# Altium PCB Lora_ver1.0.PcbDoc
Units mil, origin at the board's own origin, x right, y up, seen from the top; angles counter-clockwise.
Board outline 1653.54 x 3149.61 mil, 2 copper layers (Top Layer, Bottom Layer); 29 components, 19 nets, 108 pads, 13 vias.
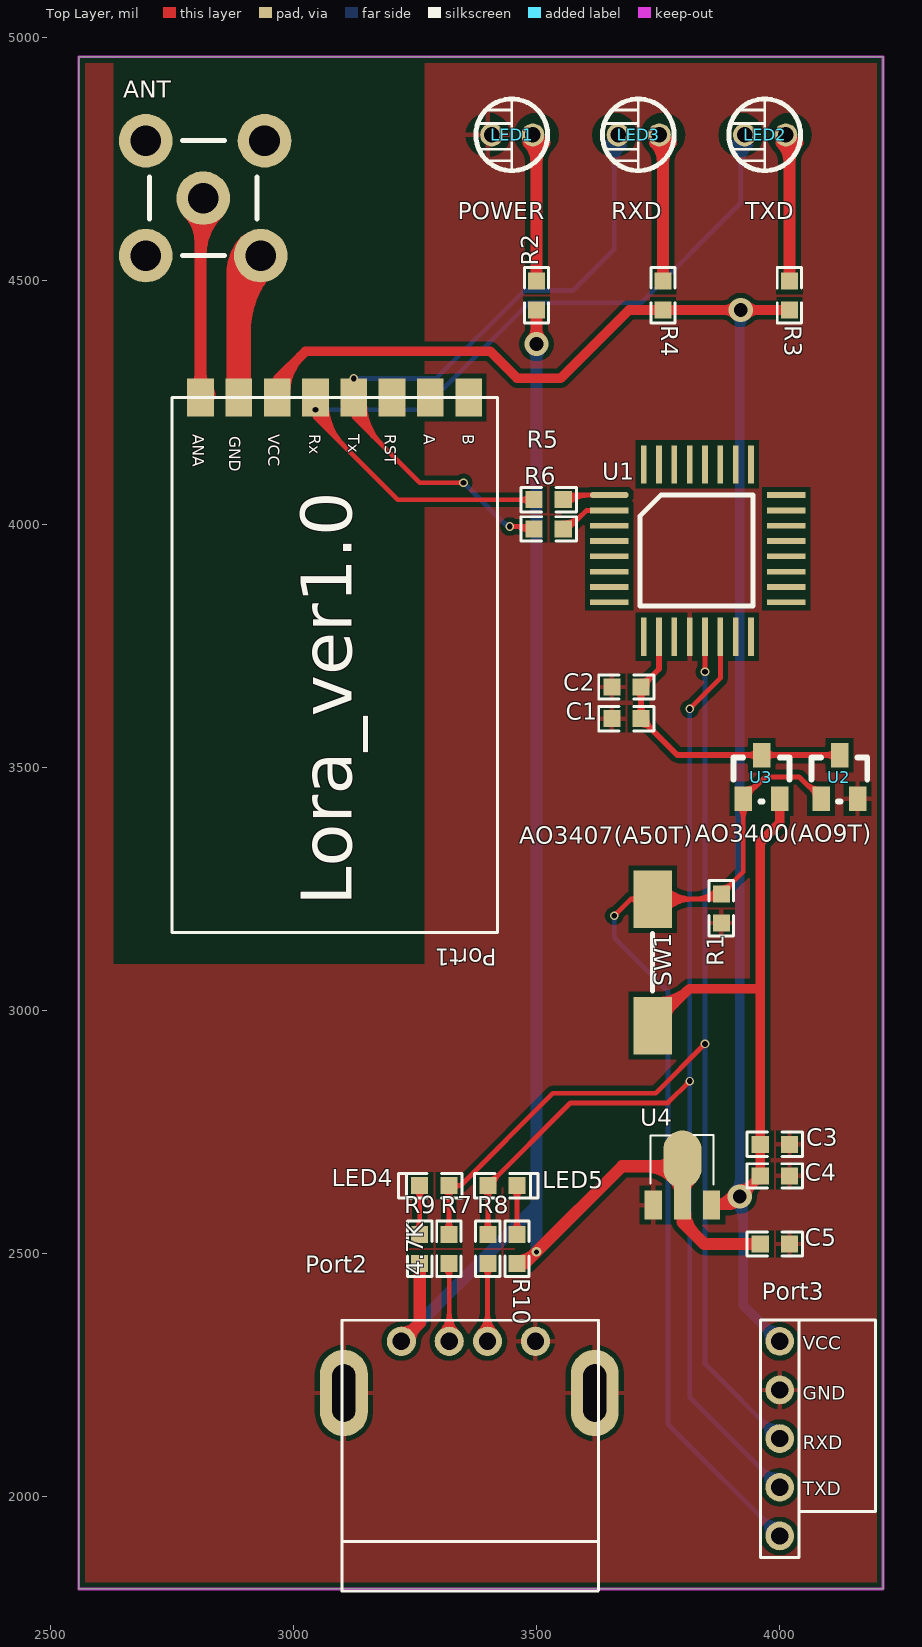
[diagram p0: Top Layer view]
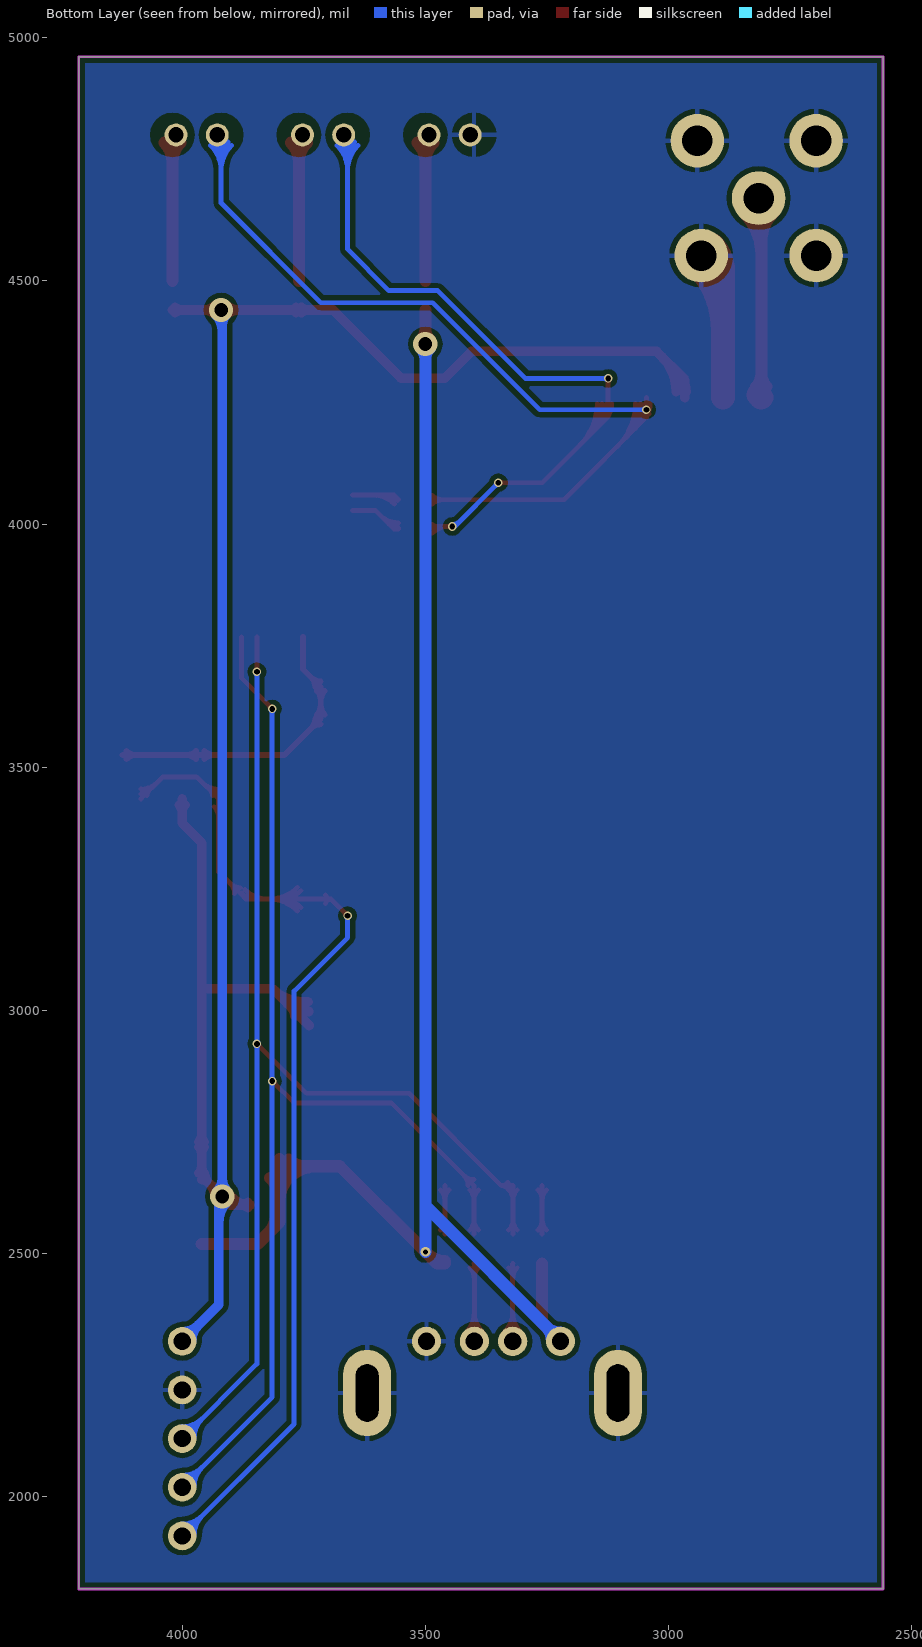
[diagram p1: Bottom Layer view, seen from below]

## Layer stack, top to bottom
Top Layer: signal copper 1.4
Dielectric: dielectric 12.6, FR-4, Dk 4.8
Bottom Layer: signal copper 1.4

## Board outline
2559.06,1811.02 4212.6,1811.02 4212.6,4960.63 2559.06,4960.63

## Design rules (kind name [scope] priority, off if disabled: settings)
Clearance [All] p1: gap=10
PolygonConnect [All] p1: connectstyle=Relief reliefconductorwidth=10 reliefentries=4 polygonreliefangle="90 Angle"
RoutingVias [All] p1: holewidth=28 width=50 viastyle="Through Hole" minholewidth=8 minwidth=10 maxholewidth=28 maxwidth=50
SilkscreenOverComponentPads [All] p1: minsilkscreentomaskgap=10
SolderMaskExpansion [All] p1: expansion=4
Width [All] p1: maxlimit=50 minlimit=10 preferedwidth=10
27 further rules are at their usual default settings.

## Components (designator, comment, footprint, x,y, rotation, side; value= is the part's Value field where it differs from the comment)
ANT "ANT" SWA-KE天线母座 2815,4670 r0 top
C1 "47uF" 0603 3655,3600 r0 top
C2 "104" 0603 3655,3665 r0 top
C3 "104" 0603 4020,2725 r180 top
C4 "104" 0603 3960,2660 r0 top
C5 "10uF" 0603 3960,2520 r0 top
LED1 "POWER" 2.54LED 3400,4800 r180 top
LED2 "TXD" 2.54LED 3920,4800 r180 top
LED3 "RXD" 2.54LED 3660,4800 r180 top
LED4 "RX" LED-0603 3260,2640 r0 top
LED5 "TX" LED-0603 3460,2640 r180 top
Port1 "Lora" LoRa_Usart 3085,4260 r270 top
Port2 "USB_A" USB-A 3360,2320 r0 top
Port3 "DEBUG" STC_DEBUG 4000,2120 r0 top
R1 "1M" 0603 3880,3180 r90 top
R2 "4.7K" 0603 3500,4500 r270 top
R3 "4.7K" 0603 4020,4500 r270 top
R4 "4.7K" 0603 3760,4500 r270 top
R5 "0R" 0603 3495,4050 r0 top
R6 "0R" 0603 3495,3990 r0 top
R7 "0R" 0603 3320,2480 r90 top
R8 "0R" 0603 3400,2480 r90 top
R9 "4.7K" 0603 3260,2540 r270 top
R10 "4.7K" 0603 3460,2540 r270 top
SW1 "REST" SW-1 3660,3040 r180 top
U1 "STC8F2K32S2" LQPF-32 3685,4095 r0 top
U2 "AO3400(AO9T)" SOT-23 4120,3480 r0 top
U3 "AO3407(A50T)" SOT-23 3960,3480 r0 top
U4 "HT7533-1" 3A5A3D 3800,2600 r0 top

## Footprints (in the part's own frame and the unit in brackets; to place one, negate y for a bottom-side part, rotate by r counter-clockwise, add the part's x,y. Pads: shape width x height; smd on the part's side, far side on the other; paste and mask are expansions set on the pad)
2.54LED [mm]
  round 1.2 hole 0.8: 1(-2.35,0) 2(-0.2,0)
  silkscreen extent -3.12,-1.87 0.62,1.9
3A5A3D [mm]
  rect 0.9x1.5 smd: 1(-1.524,0) 3(1.524,0)
  rect 0.9x1.8 smd: 2(0,0.15)
  oval 2x3 smd: 2(0,2.4)
  silkscreen extent -1.68,1.07 1.63,3.67
0603 [mil]
  rect 35x35 smd: 1(0,0) 2(60,0)
  silkscreen extent -27,-25 87,25
LED-0603 [mil]
  rect 35x35 smd: 1(0,0) 2(60,0)
  silkscreen extent -43,-25 87,25
LoRa_Usart [mm]
  rect 2x1.397 smd: 1(0,7) 2(0,5) 3(0,3) 4(0,1) 5(0,-1) 6(0,-3) 7(0,-5) 8(0,-7)
  silkscreen extent 0,-8.5 27.94,8.5
LQPF-32 [mm]
  oct 2x0.3 smd: 1(-0.9,-0.9)
  rect 2x0.3 smd: 2(-0.9,-1.7) 3(-0.9,-2.5) 4(-0.9,-3.3) 5(-0.9,-4.1) 6(-0.9,-4.9) 7(-0.9,-5.7) 8(-0.9,-6.5) 17(8.35,-6.5) 18(8.35,-5.7) 19(8.35,-4.9) 20(8.35,-4.1) 21(8.35,-3.3) 22(8.35,-2.5) 23(8.35,-1.7) 24(8.35,-0.9)
  rect 0.3x2 smd: 9(0.9,-8.3) 10(1.7,-8.3) 11(2.5,-8.3) 12(3.3,-8.3) 13(4.1,-8.3) 14(4.9,-8.3) 15(5.7,-8.3) 16(6.5,-8.3) 25(6.5,0.7) 26(5.7,0.7) 27(4.9,0.7) 28(4.1,0.7) 29(3.3,0.7) 30(2.5,0.7) 31(1.7,0.7) 32(0.9,0.7)
  silkscreen extent 0.7,-6.7 6.6,-0.9
SOT-23 [mil]
  rect 36x50 smd: 1(40,-45) 2(-35,-45) 3(3,45)
  silkscreen extent -55,-50 60,40
STC_DEBUG [mm]
  round 1.5 hole 0.9: 1(0,5.08) 2(0,2.54) 3(0,0) 4(0,-2.54) 5(0,-5.08)
  silkscreen extent -1,-6.2 5,6.2
SW-1 [mm]
  rect 2x3 smd: 1(-2,1.8) 2(-2,-4.8)
  silkscreen extent -2,-3 -2,0
SWA-KE天线母座 [mm]
  round 2.8 hole 1.6: 1(0,0) 2(-3,-3) 2(-3,3) 2(3,-3) 2(3.2,3)
  silkscreen extent -2.8,-3 2.8,3
USB-A [mm]
  round 1.524 hole 0.9: 1(-3.5,0) 2(-1,0) 3(1,0) 4(3.5,0)
  oval 2.5x4.5 hole 1.2 slot 3 at 90 deg: 4(-6.5,-2.7) 4(6.6,-2.7)
  silkscreen extent -6.6,-13.05 6.8,1.1

## Part data
ANT C1 C2 C3 C4 C5: library part Cap, "Capacitor"
LED1 LED2 LED3 LED4 LED5: library part DIODE, "diode"
Port2: library part USB
Port3: library part PIN-5
R1 R2 R3 R4 R5 R6 R7 R8 R9 R10: library part Res2, "Resistor"
SW1: library part SW-P, "key"
U1: library part STC8F2K64S2
U2: library part MOSFET-N, "mosfet"
U3: library part MOSFET-P, "mosfet"

## Via types
v1: diameter 17.72, hole 11.81, Top Layer to Bottom Layer, 9 vias
v2: diameter 50, hole 28, Top Layer to Bottom Layer, 3 vias
v3: diameter 20, hole 10, Top Layer to Bottom Layer, 1 vias

## Nets (pads, with @x,y where several pads share a name; then routed paths per layer and width w, separated by ;. In a path a pad name is that pad's centre, name@x,y a point inside that pad or via, vN(x,y) a via of type N, cw(c..) or ccw(c..) an arc to the next point about the centre after c; other vN are vias at no path point)
ANT: ANT.1 Port1.8 | length 687.1
  Top Layer w20: ANT.1@2809.41,4664.41 ANT.1
  Top Layer w25: ANT.1@2784.86,4639.86 cw(c2725.61,4580.61) 2809.41,4580.61 ; Port1.8@2798.8,4282.48 ccw(c2773.2,4308.08) 2809.41,4308.08 ccw(c2845.62,4308.08) Port1.8@2820.02,4282.48 ; Port1.8 ANT.1@2809.41,4664.41 ; 2809.41,4553.61 cw(c2931.39,4553.61) ANT.1@2845.14,4639.86 ; 2809.41,4613.97 cw(c2871.03,4613.97) ANT.1@2827.46,4657.54
  Top Layer w50: Port1.8 Port1.8@2815,4265.59
GND: ANT.2 C1.1 C2.1 C3.1 C4.2 C5.2 LED1.2 Port1.7 Port2.4 Port3.2 R1.1 U1.12 U2.1 U4.1 | length 533.4
  Top Layer w50: Port1.7 2888.15,4522.68 ANT.2@2925.24,4559.76 ; 2888.15,4397.52 cw(c3087.48,4397.52) ANT.2@2946.53,4538.47 ; 2888.15,4518.23 cw(c2966.77,4518.23) ANT.2@2911.18,4573.82
LORA-RX: LED3.2 Port1.4 R6.1 | length 2039.4
  Top Layer w10: Port1.4@3116.87,4248.13 ccw(c3165.15,4248.13) 3131.01,4213.99 ; Port1.4@3121.64,4296.64 cw(c3115.06,4290.06) 3124.37,4290.06 cw(c3133.68,4290.06) Port1.4@3127.1,4296.64 ; v1(3124.37,4299.37) Port1.4 3124.37,4220.63 3260,4085 v1(3350,4085) ; Port1.4@3126.87,4248.13 ccw(c3199.3,4248.13) 3148.08,4196.92 ; Port1.4@3136.87,4248.13 ccw(c3233.44,4248.13) 3165.15,4179.85 ; Port1.4@3146.87,4248.13 ccw(c3267.58,4248.13) 3182.23,4162.77 ; v1@3347.27,4082.27 ccw(c3340.69,4075.69) 3340.69,4085 ccw(c3340.69,4094.31) v1@3347.27,4087.73 ; v1(3445,3995) 3490,3995 R6.1 ; v1@3447.73,3992.27 cw(c3454.31,3985.69) 3454.31,3995 cw(c3454.31,4004.31) v1@3447.73,3997.73 ; v1@3452.75,3995 cw(c3452.75,3947.75) R6.1@3486.16,3981.16 ; R6.1@3486.16,3998.84 cw(c3476.89,4008.11) 3476.89,3995 cw(c3476.89,3971.89) R6.1@3493.23,3988.23
  Bottom Layer w10: v1(3124.37,4299.37) 3294.37,4299.37 3475,4480 3575,4480 3660,4565 LED3.2@3660,4800 ; v1@3127.1,4296.64 cw(c3133.68,4290.06) 3133.68,4299.37 cw(c3133.68,4308.68) v1@3127.1,4302.1 ; v1@3350,4081.14 cw(c3350,4071.83) 3356.59,4078.41 cw(c3363.17,4085) v1@3353.86,4085 ; v1(3350,4085) 3440,3995 v1(3445,3995) ; 3429.88,4005.12 ccw(c3445,4020.24) v1@3445,3998.86 ; 3638.48,4778.48 cw(c3586.53,4726.53) 3660,4726.53 cw(c3733.47,4726.53) 3681.52,4778.48 ; 3645.55,4785.55 cw(c3610.67,4750.67) 3660,4750.67 cw(c3709.33,4750.67) LED3.2@3674.45,4785.55
LORA-TX: LED2.2 Port1.5 R5.1 | length 2298.4
  Top Layer w10: Port1.5@3038.13,4248.13 ccw(c3089.46,4248.13) 3053.16,4211.84 ; Port1.5@3040.22,4226.29 cw(c3038.5,4219.37) 3045.63,4219.37 ; Port1.5@3042.9,4237.73 ccw(c3036.32,4244.31) 3045.63,4244.31 ccw(c3054.94,4244.31) Port1.5@3048.36,4237.73 ; v1(3045.63,4235) Port1.5 ; Port1.5@3048.13,4248.13 ccw(c3123.6,4248.13) 3070.23,4194.77 ; Port1.5@3051.04,4226.29 ccw(c3052.76,4219.37) 3045.63,4219.37 ; Port1.5@3058.13,4248.13 ccw(c3157.74,4248.13) 3087.3,4177.69 ; Port1.5@3068.13,4248.13 ccw(c3191.88,4248.13) 3104.38,4160.62 ; R5.1@3486.16,4041.16 ccw(c3464.82,4019.82) 3464.82,4050 ccw(c3464.82,4080.18) R5.1@3486.16,4058.84 ; R5.1 3215,4050 3045.63,4219.37
  Bottom Layer w10: v1(3045.63,4235) 3265,4235 3485,4455 3715,4455 3920,4660 LED2.2@3920,4800 ; v1@3048.36,4232.27 cw(c3054.94,4225.69) 3054.94,4235 cw(c3054.94,4244.31) v1@3048.36,4237.73 ; 3898.48,4778.48 cw(c3846.53,4726.53) 3920,4726.53 cw(c3993.47,4726.53) 3941.52,4778.48 ; 3905.55,4785.55 cw(c3870.67,4750.67) 3920,4750.67 cw(c3969.33,4750.67) LED2.2@3934.45,4785.55
NetLED1_1: LED1.1 R2.1 | length 387
  Top Layer w25: LED1.1@3483.78,4783.78 cw(c3444.63,4744.63) 3500,4744.63 cw(c3555.37,4744.63) 3516.22,4783.78 ; R2.1 LED1.1@3500,4800
NetLED2_1: LED2.1 R3.1 | length 387
  Top Layer w25: LED2.1@4003.78,4783.78 cw(c3964.63,4744.63) 4020,4744.63 cw(c4075.37,4744.63) 4036.22,4783.78 ; R3.1 LED2.1@4020,4800
NetLED3_1: LED3.1 R4.1 | length 387
  Top Layer w25: LED3.1@3743.78,4783.78 cw(c3704.63,4744.63) 3760,4744.63 cw(c3815.37,4744.63) 3776.22,4783.78 ; R4.1 LED3.1@3760,4800
NetLED4_1: LED4.1 R9.1 | length 194.8
  Top Layer w10: R9.1@3251.16,2548.84 ccw(c3229.82,2570.18) 3260,2570.18 ccw(c3290.18,2570.18) R9.1@3268.84,2548.84 ; LED4.1@3251.16,2631.16 cw(c3229.82,2609.82) 3260,2609.82 cw(c3290.18,2609.82) LED4.1@3268.84,2631.16 ; R9.1 LED4.1
NetLED5_1: LED5.1 R10.1 | length 194.8
  Top Layer w10: R10.1@3451.16,2548.84 ccw(c3429.82,2570.18) 3460,2570.18 ccw(c3490.18,2570.18) R10.1@3468.84,2548.84 ; LED5.1@3451.16,2631.16 cw(c3429.82,2609.82) 3460,2609.82 cw(c3490.18,2609.82) LED5.1@3468.84,2631.16 ; R10.1 LED5.1
NetPort2_2: Port2.2 R7.1 | length 359.4
  Top Layer w10: Port2.2@3302.95,2337.68 ccw(c3260.27,2380.36) 3320.63,2380.36 ccw(c3380.99,2380.36) Port2.2@3338.31,2337.68 ; Port2.2@3310.02,2330.61 ccw(c3284.42,2356.21) 3320.63,2356.21 ccw(c3356.84,2356.21) Port2.2@3331.24,2330.61 ; R7.1@3311.16,2471.16 cw(c3288.3,2448.3) 3320.63,2448.3 ; R7.1 3320.63,2479.37 Port2.2 ; 3320.63,2451.34 cw(c3348.66,2451.34) R7.1@3328.84,2471.16
NetPort2_3: Port2.3 R8.1 | length 359.4
  Top Layer w10: Port2.3@3381.69,2337.68 ccw(c3339.01,2380.36) 3399.37,2380.36 ccw(c3459.73,2380.36) Port2.3@3417.05,2337.68 ; Port2.3@3388.76,2330.61 ccw(c3363.16,2356.21) 3399.37,2356.21 ccw(c3435.58,2356.21) Port2.3@3409.98,2330.61 ; R8.1@3391.16,2471.16 cw(c3371.34,2451.34) 3399.37,2451.34 ; Port2.3 3399.37,2479.37 R8.1 ; 3399.37,2448.3 cw(c3431.7,2448.3) R8.1@3408.84,2471.16
P10: R5.2 U1.1 | length 178.3
  Top Layer w10: R5.2 3564.57,4059.57 U1.1 ; R5.2@3556.77,4048.23 cw(c3584.13,4020.87) 3584.13,4059.57 ; R5.2@3563.84,4041.16 cw(c3608.27,3996.73) 3608.27,4059.57
P11: R6.2 U1.2 | length 176.7
  Top Layer w10: R6.2 3565,3990 3603.07,4028.07 U1.2 ; R6.2@3555,3992.5 ccw(c3555,4022.68) 3576.34,4001.34 ; R6.2@3555,4002.5 ccw(c3555,4056.82) 3593.41,4018.41
RXD: LED4.2 Port3.3 R7.2 U1.13 | length 2806.7
  Top Layer w10: R7.2@3311.16,2548.84 ccw(c3289.82,2570.18) 3320,2570.18 ccw(c3350.18,2570.18) R7.2@3328.84,2548.84 ; LED4.2@3311.16,2631.16 cw(c3289.82,2609.82) 3320,2609.82 cw(c3350.18,2609.82) LED4.2@3328.84,2631.16 ; R7.2 LED4.2 3343.79,2640 ; LED4.2@3330.29,2632.91 cw(c3343.79,2623.62) 3343.79,2640 ; LED4.2@3330.29,2647.09 ccw(c3343.79,2656.38) 3343.79,2640 ; v1@3842.56,2931.42 cw(c3833.24,2931.42) 3839.83,2924.83 cw(c3846.42,2918.24) v1@3846.42,2927.56 ; v1@3843.69,3699.15 ccw(c3837.1,3705.73) 3846.42,3705.73 ccw(c3855.73,3705.73) v1@3849.15,3699.15 ; v1(3846.42,2931.42) 3745,2830 3533.79,2830 3343.79,2640 ; v1(3846.42,3696.42) U1.13
  Bottom Layer w10: v1@3843.69,2928.69 cw(c3837.1,2922.1) 3846.42,2922.1 cw(c3855.73,2922.1) v1@3849.15,2928.69 ; v1@3843.69,2934.15 ccw(c3837.1,2940.73) 3846.42,2940.73 ccw(c3855.73,2940.73) v1@3849.15,2934.15 ; v1@3843.69,3693.69 cw(c3837.1,3687.1) 3846.42,3687.1 cw(c3855.73,3687.1) v1@3849.15,3693.69 ; v1(3846.42,3696.42) 3846.42,2935 v1(3846.42,2931.42) 3846.42,2273.58 Port3.3 ; Port3.3@3975.47,2120 ccw(c3916.26,2120) 3958.13,2161.87 ccw(c4000,2203.74) Port3.3@4000,2144.53 ; Port3.3@3985.47,2120 ccw(c3950.4,2120) 3975.2,2144.8 ccw(c4000,2169.6) Port3.3@4000,2134.53
TRG: Port3.5 R1.2 SW1.2 U2.2 U3.2 | length 2817.6
  Top Layer w10: v1(3660,3195) 3693.98,3228.98 ; v1@3660,3198.86 ccw(c3660,3208.17) 3666.59,3201.59 ccw(c3673.17,3195) v1@3663.86,3195 ; SW1.2@3705.54,3220.1 ccw(c3693.98,3217.01) 3693.98,3228.98 ; SW1.2@3705.54,3237.85 cw(c3693.98,3240.94) 3693.98,3228.98 ; SW1.2@3755.97,3211.74 cw(c3797.57,3170.14) 3797.57,3228.98 cw(c3797.57,3287.81) SW1.2@3755.97,3246.21 ; SW1.2@3763.04,3204.67 cw(c3821.72,3146) 3821.72,3228.98 cw(c3821.72,3311.95) SW1.2@3763.04,3253.28 ; 3823.21,3228.98 ccw(c3823.21,3296.79) R1.2@3871.16,3248.84 ; 3847.35,3228.98 ccw(c3847.35,3272.65) R1.2@3878.23,3241.77 ; R1.2@3880,3252.5 ccw(c3880,3282.68) 3901.34,3261.34 ccw(c3922.68,3240) R1.2@3892.5,3240 ; U3.2@3915.81,3418.81 cw(c3893.62,3396.62) 3925,3396.62 cw(c3956.38,3396.62) U3.2@3934.19,3418.81 ; U3.2@3925,3445 ccw(c3925,3469.14) U3.2@3942.07,3452.07 ; U3.2@3925,3455 ccw(c3925,3503.28) 3959.14,3469.14 ; U3.2@3938,3442 cw(c3952.49,3442) U3.2@3942.24,3452.24 ; 4050.86,3469.14 ccw(c4085,3503.28) U2.2@4085,3455 ; U2.2@4067.76,3452.24 cw(c4057.51,3442) U2.2@4072,3442 ; U2.2@4067.93,3452.07 ccw(c4085,3469.14) U2.2@4085,3445 ; U2.2 4040,3480 3970,3480 U3.2 3925,3285 R1.2 3868.98,3228.98 SW1.2 3693.98,3228.98
  Bottom Layer w10: v1@3657.27,3192.27 cw(c3650.69,3185.69) 3660,3185.69 cw(c3669.31,3185.69) v1@3662.73,3192.27 ; v1(3660,3195) 3660,3150 3770,3040 3770,2150 Port3.5 ; Port3.5@3975.47,1920 ccw(c3916.26,1920) 3958.13,1961.87 ccw(c4000,2003.74) Port3.5@4000,1944.53 ; Port3.5@3985.47,1920 ccw(c3950.4,1920) 3975.2,1944.8 ccw(c4000,1969.6) Port3.5@4000,1934.53
TXD: LED5.2 Port3.4 R8.2 U1.14 | length 2818.4
  Top Layer w10: R8.2@3391.16,2548.84 ccw(c3369.82,2570.18) 3400,2570.18 ccw(c3430.18,2570.18) R8.2@3408.84,2548.84 ; LED5.2@3391.16,2631.16 cw(c3369.82,2609.82) 3400,2609.82 cw(c3430.18,2609.82) LED5.2@3408.84,2631.16 ; R8.2 LED5.2 3570,2810 3770,2810 v1(3815,2855) ; LED5.2@3400,2652.5 ccw(c3400,2682.68) 3421.34,2661.34 ccw(c3442.68,2640) LED5.2@3412.5,2640 ; v1@3811.14,2855 cw(c3801.83,2855) 3808.41,2848.41 cw(c3815,2841.83) v1@3815,2851.14 ; v1(3815,3620) 3877.91,3682.91 U1.14 ; v1@3815,3623.86 ccw(c3815,3633.17) 3821.59,3626.59 ccw(c3828.17,3620) v1@3818.86,3620
  Bottom Layer w10: v1@3812.27,2852.27 cw(c3805.69,2845.69) 3815,2845.69 cw(c3824.31,2845.69) v1@3817.73,2852.27 ; v1@3812.27,2857.73 ccw(c3805.69,2864.31) 3815,2864.31 ccw(c3824.31,2864.31) v1@3817.73,2857.73 ; v1@3812.27,3617.27 cw(c3805.69,3610.69) 3815,3610.69 cw(c3824.31,3610.69) v1@3817.73,3617.27 ; v1(3815,3620) 3815,2205 Port3.4 ; Port3.4@3975.47,2020 ccw(c3916.26,2020) 3958.13,2061.87 ccw(c4000,2103.74) Port3.4@4000,2044.53 ; Port3.4@3985.47,2020 ccw(c3950.4,2020) 3975.2,2044.8 ccw(c4000,2069.6) Port3.4@4000,2034.53
VCC: C3.2 C4.1 Port1.6 Port3.1 R3.2 R4.2 SW1.1 U3.1 U4.3 | length 5613.1
  Top Layer w20: Port1.6@2964.39,4271.87 cw(c3018.76,4271.87) 2980.31,4310.31 ; Port1.6 2966.89,4296.89 3025,4355 3405,4355 3460,4300 3550,4300 3690,4440 R4.2 3780,4440 v2(3920,4440) R3.2 ; Port1.6@2984.39,4271.87 cw(c3087.04,4271.87) 3014.46,4344.46 ; SW1.1 3814.61,3045 ; SW1.1@3739.52,2998.16 ccw(c3744.19,3054.41) 3784.1,3014.49 ; SW1.1@3741.17,3018.09 ccw(c3748.87,3110.73) 3814.6,3045 ; R4.2@3754.7,4434.7 ccw(c3741.89,4421.89) 3741.89,4440 ccw(c3741.89,4458.11) R4.2@3754.7,4445.3 ; SW1.1@3768.11,2988.82 cw(c3791.49,2988.82) SW1.1@3774.96,3005.35 ; U4.3@3865.46,2594.54 cw(c3878.63,2581.37) 3878.63,2600 cw(c3878.63,2618.63) U4.3@3865.46,2605.46 ; 3895.31,2600 ccw(c3895.31,2631.06) v2@3921.95,2615.09 ; v2@3904.79,2625.37 cw(c3860,2652.22) U4.3 3900,2600 v2(3917.66,2617.66) C4.1 3960,2720 C3.2 3960,3045 ; v2@3909.39,4429.39 ccw(c3883.79,4403.79) 3883.79,4440 ccw(c3883.79,4476.21) v2@3909.39,4450.61 ; v2@3917.66,2632.66 ccw(c3917.66,2668.87) 3943.27,2643.27 ccw(c3968.87,2617.66) v2@3932.66,2617.66 ; v2@3930.61,4429.39 cw(c3956.21,4403.79) 3956.21,4440 cw(c3956.21,4476.21) v2@3930.61,4450.61 ; C4.1@3952.5,2660 cw(c3934.39,2660) 3947.2,2647.2 cw(c3960,2634.39) C4.1@3960,2652.5 ; C4.1@3954.7,2665.3 ccw(c3941.89,2678.11) 3960,2678.11 ccw(c3978.11,2678.11) C4.1@3965.3,2665.3 ; C3.2@3954.7,2719.7 cw(c3941.89,2706.89) 3960,2706.89 cw(c3978.11,2706.89) C3.2@3965.3,2719.7 ; C3.2@3954.7,2730.3 ccw(c3941.89,2743.11) 3960,2743.11 ccw(c3978.11,2743.11) C3.2@3965.3,2730.3 ; U3.1@3994.34,3422.34 cw(c3980.69,3408.69) 4000,3408.69 cw(c4019.31,3408.69) U3.1@4005.66,3422.34 ; U3.1 4000,3385 3960,3345 3960,3045 ; R3.2@4014.7,4434.7 ccw(c4001.89,4421.89) 4001.89,4440 ccw(c4001.89,4458.11) R3.2@4014.7,4445.3 ; R4.2@3765.3,4434.7 cw(c3778.11,4421.89) 3778.11,4440 ; R4.2@3765.3,4434.7 cw(c3778.11,4421.89) 3778.11,4440 ; R4.2@3765.3,4434.7 cw(c3778.11,4421.89) 3778.11,4440 ; R4.2@3765.3,4445.3 ccw(c3778.11,4458.11) 3778.11,4440 ; R4.2@3765.3,4445.3 ccw(c3778.11,4458.11) 3778.11,4440 ; R4.2@3765.3,4445.3 ccw(c3778.11,4458.11) 3778.11,4440 ; 3814.61,3045 3960,3045
  Bottom Layer w20: v2@3907.05,2607.05 cw(c3863.72,2563.72) 3925,2563.72 ; v2@3907.05,2628.27 ccw(c3881.45,2653.87) 3917.66,2653.87 ccw(c3953.87,2653.87) v2@3928.27,2628.27 ; v2@3909.39,4429.39 cw(c3889.44,4409.44) 3917.66,4409.44 ; 3917.66,4398.13 cw(c3961.87,4398.13) v2@3930.61,4429.39 ; v2(3920,4440) 3917.66,4437.66 v2(3917.66,2617.66) 3925,2625 3925,2395 Port3.1 ; Port3.1@3980.47,2320 ccw(c3933.33,2320) 3966.66,2353.34 ccw(c4000,2386.67) Port3.1@4000,2339.53
VCC_5V: C5.1 Port2.1 R2.2 R9.2 R10.2 U4.2 | length 3761.3
  Top Layer w25: Port2.1 3260,2357.8 R9.2 ; Port2.1@3222.2,2337.5 ccw(c3222.2,2379.75) 3252.08,2349.87 ccw(c3281.95,2320) Port2.1@3239.7,2320 ; R10.2 3476.06,2480 v3(3500,2503.94) 3676.06,2680 U4.2@3800,2680 ; R10.2@3460,2485 ccw(c3460,2535.85) v3@3495.96,2499.89 ; v2@3491.16,4378.92 ccw(c3469.82,4400.26) 3500,4400.26 ccw(c3530.18,4400.26) v2@3508.84,4378.92 ; v2(3500,4370.08) R2.2 ; 3722.58,2680 cw(c3722.58,2597.39) 3781,2655.8 cw(c3735.13,2609.93) 3800,2609.93 cw(c3864.87,2609.93) U4.2@3819,2655.8 ; 3747.68,2680 ccw(c3747.68,2727.13) U4.2@3781,2693.8 ; U4.2@3800,2694.49 U4.2@3800,2680 ; U4.2@3805.22,2588.19 ccw(c3873.79,2588.19) 3825.3,2539.7 ; C5.1 3845,2520 3800,2565 3800,2605.91 U4.2@3800,2680
  Bottom Layer w25: Port2.1 3222.2,2320.63 3500,2598.43 ; Port2.1@3222.2,2337.5 ccw(c3222.2,2378.23) 3251,2349.43 ; Port2.1@3239.7,2320 cw(c3283.47,2320) 3252.52,2350.95 ; v2@3491.16,4361.24 cw(c3469.82,4339.9) 3500,4339.9 cw(c3530.18,4339.9) v2@3508.84,4361.24 ; v3(3500,2503.94) 3500,2598.43 ; v2(3500,4370.08) 3500,2598.43
VCORE: C1.2 C2.2 U1.10 U2.3 U3.3 | length 933.6
  Top Layer w12: C1.2@3706.87,3608.13 ccw(c3687.24,3627.76) 3715,3627.76 ccw(c3742.76,3627.76) C1.2@3723.13,3608.13 ; C2.2@3706.87,3656.87 cw(c3687.24,3637.24) 3715,3637.24 cw(c3742.76,3637.24) C2.2@3723.13,3656.87 ; C1.2@3715,3588.5 cw(c3715,3560.74) 3734.63,3580.37 cw(c3754.26,3600) C1.2@3726.5,3600 ; C2.2@3715,3676.5 ccw(c3715,3704.26) 3734.63,3684.63 ccw(c3754.26,3665) C2.2@3726.5,3665 ; U1.10 3751.93,3701.93 C2.2 C1.2 3790,3525 U3.3 4000,3525 U2.3 ; U3.3@3954.51,3516.51 ccw(c3934.03,3496.03) 3934.03,3525 ccw(c3934.03,3553.97) U3.3@3954.51,3533.49 ; U3.3@3971.49,3516.51 cw(c3991.97,3496.03) 3991.97,3525 cw(c3991.97,3553.97) U3.3@3971.49,3533.49 ; U2.3@4114.51,3516.51 ccw(c4094.03,3496.03) 4094.03,3525 ccw(c4094.03,3553.97) U2.3@4114.51,3533.49
pads on no net: Port1.1 Port1.2 Port1.3 U1.3 U1.4 U1.5 U1.6 U1.7 U1.8 U1.9 U1.11 U1.15 U1.16 U1.17 U1.18 U1.19 U1.20 U1.21 U1.22 U1.23 U1.24 U1.25 U1.26 U1.27 U1.28 U1.29 U1.30 U1.31 U1.32

## Polygon pours and split planes (outlines as drawn)
GND on Bottom Layer "Bottom Layer-No Net" (solid, remove dead copper, pour order 1000): 2170,5260 2355,5075 2355,1645 5170,1645 5180,1655 4835,2000 4835,5105
GND on Top Layer "Bottom Layer-No Net" (solid, remove dead copper, pour order 1001): 2130,5249.57 2130,1600.1 2138.99,1590 2174.95,1630.38 4229.09,1630.38 4229.09,5204.14 4310,5295

## Keep-outs
Keep-Out Layer:
  the board outline again, w6

## Other copper
Top Layer:
  pour cut-out: 2630,4960.63 2630,3095 3270,3095 3270,4955.63 3265,4960.63

## Silkscreen, mask and mechanical layers (free items; w line width, h text height)
Top Overlay:
  text "Lora_ver1.0" at 3155,3215 h180 r90

## Text inside footprints (layer, text, board x,y; h text height)
Port1: Top Overlay "B" at 3340,4185 h40 r270; Top Overlay "A" at 3260,4185 h40 r270; Top Overlay "RST" at 3180,4185 h40 r270; Top Overlay "Tx" at 3105,4185 h40 r270; Top Overlay "Rx" at 3025,4185 h40 r270; Top Overlay "GND" at 2860,4180 h40 r270; Top Overlay "ANA" at 2785,4185 h40 r270; Top Overlay "VCC" at 2940,4185 h40 r270
Port3: Top Overlay "TXD" at 4047.24,1994.02 h47.24; Top Overlay "RXD" at 4047.24,2088.5 h47.24; Top Overlay "GND" at 4047.24,2190.87 h47.24; Top Overlay "VCC" at 4047.24,2293.23 h47.24